# Altium PCB Sony UX BMS.PcbDoc
Units mil, origin at the board's own origin, x right, y up, seen from the top; angles counter-clockwise.
Board outline 2520.22 x 748.56 mil, 2 copper layers (Top Layer, Bottom Layer); 23 components, 13 nets, 92 pads, 8 vias.
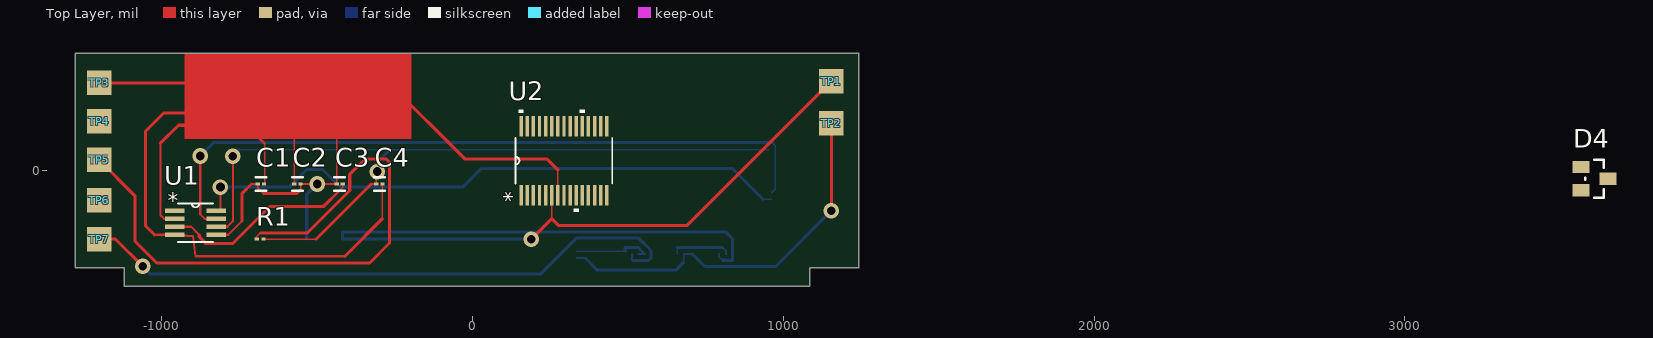
[diagram p0: Top Layer view]
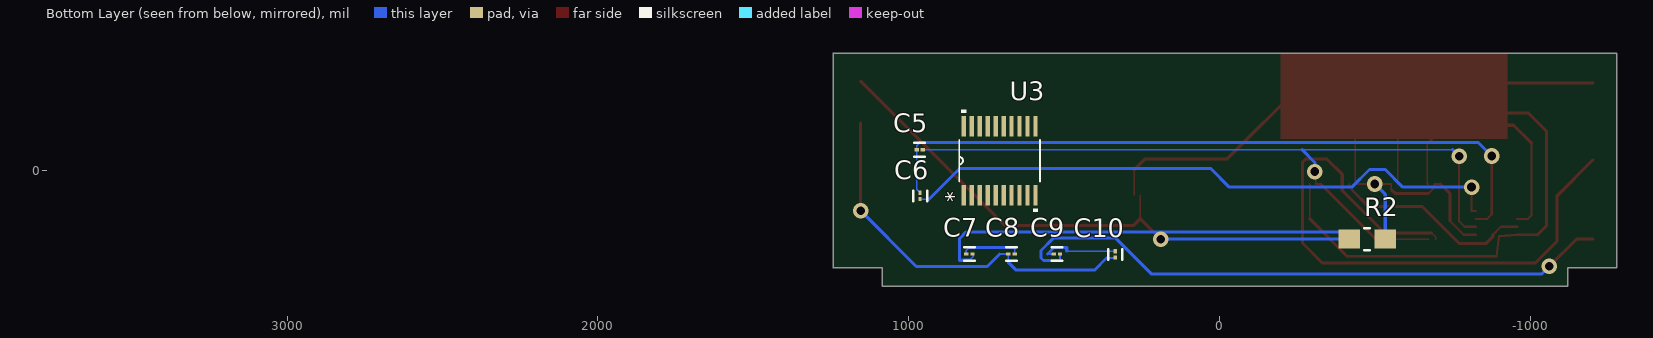
[diagram p1: Bottom Layer view, seen from below]
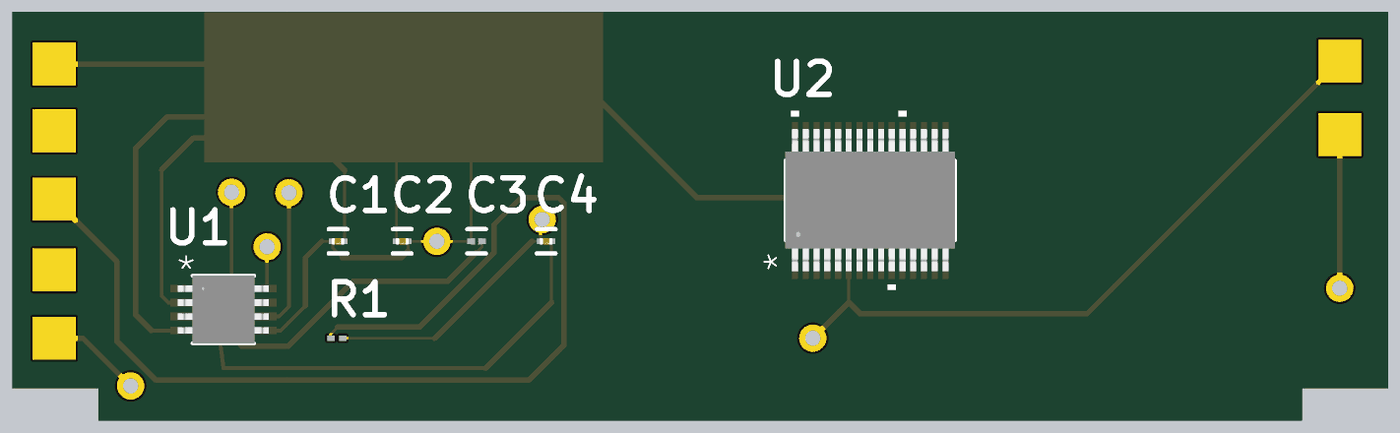
[diagram p2: 3D render of the assembled board from above, using the file's embedded part models]
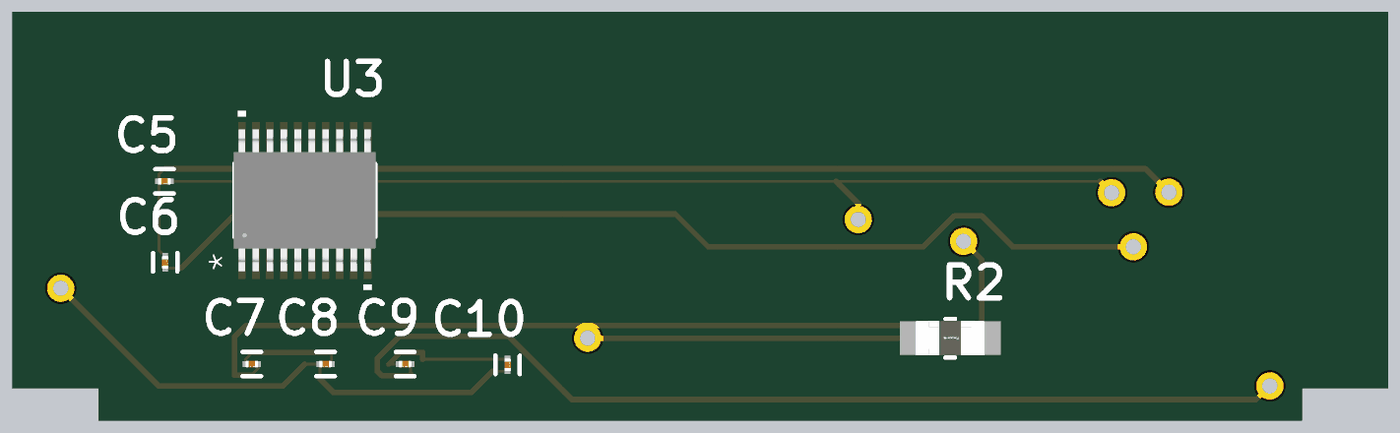
[diagram p3: 3D render of the assembled board from below, using the file's embedded part models]

## Layer stack, top to bottom
Top Solder: solder mask 0.4, Solder Resist, Dk 3.5
Top Layer: signal copper 1.4
Dielectric 1: dielectric 12.6, FR-4, Dk 4.8
Bottom Layer: signal copper 1.4
Bottom Solder: solder mask 0.4, Solder Resist, Dk 3.5

## Board outline
-1276.34,-314.27 -1119.12,-314.27 -1119.12,-373.06 -1118.86,-373.33 1085.87,-373.33 1086.13,-373.06 1086.13,-314.27 1243.35,-314.27 1243.61,-314.01 1243.61,374.97 1243.35,375.23 -1276.34,375.23 -1276.6,374.97

## Design rules (kind name [scope] priority, off if disabled: settings)
Clearance [All] p1: gap=10 ignorepadtopadclearanceinfootprint=FALSE except(0: Arc-Hole Track-Hole SMDPad-Hole THPad-Hole Via-Hole Fill-Hole Poly-Hole Region-Hole Text-Hole)
PolygonConnect [All] p1: connectstyle=Relief reliefconductorwidth=10 reliefentries=4 polygonreliefangle="90 Angle" airgapwidth=10
RoutingVias [All] p1: holewidth=28 width=50 viastyle="Through Hole" minholewidth=28 minwidth=50 maxholewidth=28 maxwidth=50
SMDNeckDown [All] p1: percent=50.000
SolderMaskExpansion [All] p1: expansion=4 istentingtop=FALSE
Width [All] p1: maxlimit=10 minlimit=10 preferedwidth=10
30 further rules are at their usual default settings.

## Components (designator, comment, footprint, x,y, rotation, side; value= is the part's Value field where it differs from the comment)
C1 "0.1uF" FP-GRM033-0_03-IPC_C -680.01,-45 r0 top
C2 "0.1uF" FP-GRM033-0_03-IPC_C -562.48,-45 r0 top
C3 "0.22uF" FP-CL03-IPC_C -426.24,-45 r0 top
C4 "0.1uF" FP-GRM033-0_03-IPC_C -298.76,-45 r0 top
C5 "0.1uF" FP-GRM033-0_03-IPC_C 965.01,65 r180 bottom
C6 "0.1uF" FP-GRM033-0_03-IPC_C 963.69,-83.5 r90 bottom
C7 "0.1uF" FP-GRM033-0_03-IPC_C 805.01,-270 r180 bottom
C8 "0.1uF" FP-GRM033-0_03-IPC_C 669.83,-270 r180 bottom
C9 "0.1uF" FP-GRM033-0_03-IPC_C 523.88,-270 r180 bottom
C10 "0.1uF" FP-GRM033-0_03-IPC_C 336.44,-271.32 r90 bottom
D4 "BAT54C" FP-MA03D-MFG 3610,-28.07 r0 top value=10pF
R1 "1k" RESC0603X26X15LL03T05 -682.23,-222.54 r0 top
R2 "0.010 75ppm" FP-ERJ8CW-MFG -474.3,-222.54 r0 bottom
TP1 "Pad" PAD_SQ_2MM 1155,285 r0 top
TP2 "Pad" PAD_SQ_2MM 1155,150.63 r0 top
TP3 "1N" PAD_SQ_2MM -1200,280 r0 top
TP4 "1P" PAD_SQ_2MM -1200,157.4 r0 top
TP5 "2P" PAD_SQ_2MM -1200,32.24 r0 top
TP6 "3P" PAD_SQ_2MM -1200,-97.38 r0 top
TP7 "4P" PAD_SQ_2MM -1200,-222.54 r0 top
U1 "BQ29412DCTRG4-SQ" DCT8 -890,-170 r0 top
U2 "BQ29330DBT" DBT30 295,30 r90 top
U3 "BQ20Z70PW-V160" PW20 708.03,30 r90 bottom

## Footprints (in the part's own frame and the unit in brackets; to place one, negate y for a bottom-side part, rotate by r counter-clockwise, add the part's x,y. Pads: shape width x height; smd on the part's side, far side on the other; paste and mask are expansions set on the pad)
DBT30 [mil]
  rect 66x11 smd paste-33 mask-33: 1(-111,137.8) 2(-111,118.11) 3(-111,98.43) 4(-111,78.74) 5(-111,59.06) 6(-111,39.37) 7(-111,19.69) 8(-111,0) 9(-111,-19.68) 10(-111,-39.37) 11(-111,-59.05) 12(-111,-78.74) 13(-111,-98.42) 14(-111,-118.11) 15(-111,-137.79) 16(111,-137.79) 17(111,-118.11) 18(111,-98.42) 19(111,-78.74) 20(111,-59.05) 21(111,-39.37) 22(111,-19.68) 23(111,0) 24(111,19.69) 25(111,39.37) 26(111,59.06) 27(111,78.74) 28(111,98.43) 29(111,118.11) 30(111,137.8)
  silkscreen extent -164,-155 164,156, body extent -130,-156 131,156, height 47
DCT8 [mil]
  rect 61.5x14 smd paste-30.75 mask-31: 1(-66.75,38.39) 2(-66.75,12.8) 3(-66.75,-12.8) 4(-66.75,-38.39) 5(66.75,-38.39) 6(66.75,-12.8) 7(66.75,12.8) 8(66.75,38.39)
  silkscreen extent -57,-62 57,62, body extent -84,-62 84,62, height 51
FP-CL03-IPC_C [mil]
  rect 13.94x10.34 smd paste+0 mask+0: 1(-10.01,0) 2(10.01,0)
  silkscreen extent -17,-22 17,22, body extent -21,-10 21,10, height 10
FP-ERJ8CW-MFG [mm]
  rect 1.75x1.55 smd paste+0 mask+0: 1(-1.475,0) 2(1.475,0)
  silkscreen extent -0.23,-0.9 0.23,0.9, body extent -1.6,-0.8 1.6,0.8, height 0.75
FP-GRM033-0_03-IPC_C [mil]
  rect 13.94x10.34 smd paste+0 mask+0: 1(-10.01,0) 2(10.01,0)
  silkscreen extent -17,-22 17,22, body extent -21,-10 21,10, height 10
FP-MA03D-MFG [mm]
  rect 1.4x1 smd paste+0 mask+0: 1(-1.1,0.95) 2(-1.1,-0.95) 3(1.1,0)
  silkscreen extent -0.75,-1.56 0.75,1.56, body extent -1.9,-1.66 1.9,1.66, height 0.25
PAD_SQ_2MM [mm]
  rect 2x2 smd paste-1: 1(0,0)
PW20 [mil]
  rect 66x14 smd paste-33 mask-33: 1(-111,115.16) 2(-111,89.57) 3(-111,63.98) 4(-111,38.39) 5(-111,12.8) 6(-111,-12.8) 7(-111,-38.39) 8(-111,-63.98) 9(-111,-89.57) 10(-111,-115.16) 11(111,-115.16) 12(111,-89.57) 13(111,-63.98) 14(111,-38.39) 15(111,-12.8) 16(111,12.8) 17(111,38.39) 18(111,63.98) 19(111,89.57) 20(111,115.16)
  silkscreen extent -164,-130 164,130, body extent -130,-130 130,130, height 47
RESC0603X26X15LL03T05 [mm] "Chip Resistor, 2-Leads, Body 0.60x0.30mm, IPC High Density"
  rect 0.35x0.25 smd: 1(-0.275,0) 2(0.275,0)
  body extent -0.32,-0.16 0.31,0.17, height 0.26

## Part data
C1 C2 C4 C5 C6 C7 C8 C9 C10: library part CMP-2010-01264-2, "Chip Multilayer Ceramic Capacitors for General Purpose, 0201, 0.10uF, X5R, 15%, 10%, 10V", Capacitance=100nF, Case Code (Imperial)=0201, Case Code (Metric)=0603, Dielectric=X5R, Max Operating Temperature=85°C, Min Operating Temperature=-55°C, Package Quantity=1, Tolerance=10%, Voltage=10V, Case/Package=0201, Depth=0.3mm, Height=0.3mm, Lead Free="Lead Free", Length=0.6mm, Mount="Surface Mount", Packaging="Tape and Reel", Radiation Hardening=No, REACH SVHC="No SVHC", Termination=SMD/SMT, Thickness=0.013inch, Voltage Rating=10V, Voltage Rating (DC)=10V, Weight=6E-06oz, Width=0.012inch
C3: library part CMP-13271-002367-1, "Cap Ceramic 220nF 10V X5R ±10% Pad SMD 0201 +85°C T/R", Capacitance=220nF, Case Code (Imperial)=0201, Case Code (Metric)=0603, Dielectric=X5R, Max Operating Temperature=85°C, Min Operating Temperature=-55°C, Package Quantity=1, Tolerance=10%, Voltage Rating=10V, Case/Package=0201, Depth=0.3mm, Lead Free="Lead Free", Length=0.6mm, Mount="Surface Mount", Packaging="Tape and Reel", Radiation Hardening=No, Thickness=0.013inch, Voltage Rating (DC)=10V, Width=0.012inch
D4: library part CMP-07162-000010-1, "DIODE ARRAY SCHOTTKY 30V SOT23-3", Capacitance=10pF, Forward Current=200mA, Manufacturer="ON Semiconductor", Max Junction Temp=+150°C, Max Repetitive Reverse Voltage=30V, Max Surge Forward Current=600mA, Package=MA03D, Peak Reverse Current=2uA, Temperature="-55°C to +150°C", Temperature Range Low=-55°C, Automotive=No, Category=Diode, ComponentLink2Description=Datasheet, ComponentLink2URL=https://media.digikey.com/pdf/Data%20Sheets/ON%20Semiconductor%20PDFs/BAT54(A,C,S).pdf, Device Class L1="Discrete Semiconductors", Device Class L2=Diodes, Device Class L3="Schottky Diodes", Digikey Description="DIODE ARRAY SCHOTTKY 30V SOT23-3", Height=1.2mm, Manufacturer Part Number=BAT54C, Obsolete Part=true, Octopart=https://octopart.com/bat54c-on+semiconductor-8095621, Reverse Voltage=30V, Standoff Height=0mm, Temperature Range High=+150°C
R1: library part CMP-2004-03624-1, Manufacturer="TE Connectivity / AMP", Part Number=CRG0201F1K0
R2: library part CMP-2003-00786-2, "RES 0.01 OHM 1% 1W 1206", Case Code (Imperial)=1206, Case Code (Metric)=3216, Max Operating Temperature=125°C, Max Power Dissipation=1W, Min Operating Temperature=-55°C, Resistance=10mR, Resistor Type="Thick Film", Temperature Coefficient=75ppm/°C, Tolerance=1%, Case/Package=1206, Depth=1.6mm, Features="Automotive AEC-Q200", Height=0.03inch, Lead Free="Lead Free", Length=3.2mm, Military Standard=Not, Mount="Surface Mount", Number of Terminations=2, Packaging="Cut Tape", Power Rating=1W, REACH SVHC="No SVHC", Termination=Flat, Width=0.063inch
TP1 TP2 TP3 TP4 TP5 TP6 TP7: library part PAD_SQ_2MM, "Test Point Square 2mm"
U2 U3: "No Description Available", Mfr_Name="Texas Instruments", RefDes=RefDes, Type=Type

## Via types
v1: diameter 50, hole 28, Top Layer to Bottom Layer, 8 vias

## Nets (pads, with @x,y where several pads share a name; then routed paths per layer and width w, separated by ;. In a path a pad name is that pad's centre, name@x,y a point inside that pad or via, vN(x,y) a via of type N, cw(c..) or ccw(c..) an arc to the next point about the centre after c; other vN are vias at no path point)
"BAT +": C9.2 TP7.1 | length 1993.9
  Top Layer w10: TP7.1 -1147.46,-222.54 v1(-1060,-310)
  Bottom Layer w5.17: C9.2 514,-270 514,-288
  Bottom Layer w10: v1(-1060,-310) -1035,-335 219.06,-335 335.06,-219 535,-219 575,-259 575,-283 567,-291 517,-291 514,-288
"BAT -": C1.1 C2.2 C3.1 R2.1 TP3.1 U1.5 U2.7 | length 2806.3
  Top Layer w5.17: -710,-45 C1.1 -690,-57 -672,-75 ; C2.2 C2.2@-552,-45 ; -552,-63 C2.2@-552,-45 ; -436.25,116.25 C3.1 v1(-498.91,-45) C2.2@-552,-45
  Top Layer w5.5: U2.7 275.31,0.69
  Top Layer w7: U1.5 -785,-208.39 -740,-163.39
  Top Layer w10: TP3.1 -600,280 ; -740,-163.39 -740,-75 -710,-45 ; -672,-75 -564,-75 -552,-63 ; -436.25,116.25 -600,280 ; 275.31,0.69 241,35 -23,35 -268,280 -600,280
  Bottom Layer w10: R2.1 -532.37,-78.46 v1(-498.91,-45)
NetC1_2: C1.2 U1.2 | length 797.8
  Top Layer w5.17: C1.2 -668,-45 -668,85
  Top Layer w7: -1003,86 -1003,-145 -990.8,-157.2 U1.2
  Top Layer w10: -1003,86 -945,144 -727,144 -668,85
NetC2_1: C2.1 C4.2 U1.4 | length 1997.3
  Top Layer w5.17: -573,131 -573,-45 C2.1 ; -289,-157 -289,-45 C4.2
  Top Layer w7: -1022,-208.39 U1.4 -898.16,-213.13 -889.85,-277.38 -409.38,-277.38
  Top Layer w10: -1022,-208.39 -1051,-179.39 -1051,125 -993,183 -625,183 -573,131 ; -409.38,-277.38 -289,-157
NetC3_2: C3.2 U1.3 | length 652.3
  Top Layer w5.17: -427,-66 -416,-55 -416,-45 C3.2
  Top Layer w7: U1.3 -904.2,-182.8 -878,-209
  Top Layer w10: -878,-209 -878,-215 -856,-237 -771,-237 -652,-118 -479,-118 -427,-66
NetC4_1: C4.1 C5.2 R1.2 U1.6 | length 2567.7
  Top Layer w4.92: R1.2 -502.65,-222.54
  Top Layer w5.17: -325.11,-45 C4.1@-309,-45 ; v1@-309,-8 C4.1@-309,-45 ; C4.1 C4.1@-309,-45
  Top Layer w7: U1.6 -787.8,-182.8 -770,-165 v1(-770,44)
  Top Layer w10: -502.65,-222.54 -325.11,-45 ; v1@-309,-8 v1(-306,-5)
  Bottom Layer w5.17: -749,65 -265,65 C5.2
  Bottom Layer w10: v1(-770,44) -749,65 ; v1(-306,-5) -306,24 -265,65
NetC5_1: C5.1 C6.2 U1.7 | length 2273.7
  Top Layer w7: v1(-875,45) -875,-142.8 -860.59,-157.2 U1.7
  Bottom Layer w5.17: C6.2 963.69,-73 975,-61.69 C5.1 975,78 965,88
  Bottom Layer w10: v1(-875,45) -832,88 965,88
NetC6_1: C6.1 U1.8 | length 1976.7
  Top Layer w7: U1.8 -810,-131.61 v1(-810,-55)
  Bottom Layer w5.17: 935,-94 963.69,-94 C6.1
  Bottom Layer w10: v1(-810,-55) -588.91,-55 -532.37,1.54 -481.54,1.54 -425,-55 -31,-55 29,5 836,5 935,-94
NetC7_1: C7.1 C8.2 | length 194.4
  Bottom Layer w5.17: 659,-249 659,-270 C8.2 ; 805,-249 816,-260 816,-270 C7.1
  Bottom Layer w10: 659,-249 805,-249
NetC9_1: C9.1 C10.2 | length 258.7
  Bottom Layer w5.17: C10.2 336.44,-261 492,-261 ; C9.1 554,-270
  Bottom Layer w10: 492,-261 492,-249 533,-249 554,-270
NetR1_1: R1.1 TP5.1 | length 2017.7
  Top Layer w4.92: R1.1 -694,-222.54 -694,-215 -681,-202
  Top Layer w10: TP5.1 -1085,-82.76 -1085,-228.43 -1014.43,-299 -330,-299 -266,-235 -266,25 -276,35 -345,35 -394,-14 -394,-66 -530,-202 -681,-202
"PACK +": C8.1 C10.1 TP2.1 | length 1246.4
  Top Layer w10: v1(1155,-131) TP2.1
  Bottom Layer w5.17: C10.1 336.44,-283 364.06,-283 ; C8.1 C8.1@680,-270 ; 680,-297 C8.1@680,-270 ; 708,-270 C8.1@680,-270
  Bottom Layer w10: 364.06,-283 403.06,-322 655,-322 680,-297 ; 708,-270 748.17,-310.17 975.83,-310.17 v1(1155,-131)
"PACK -": C7.2 R2.2 TP1.1 U2.6 | length 3290.5
  Top Layer w5.5: 255.63,-156.63 U2.6
  Top Layer w10: v1(189.72,-222.54) 255.63,-156.63 277,-178 692,-178 TP1.1
  Bottom Layer w5.17: C7.2 793,-270 793,-278.17 805,-290.17
  Bottom Layer w10: v1(189.72,-222.54) R2.2 -417,-222.54 -417,-199 815,-199 837,-221 837,-290.17 805,-290.17
pads on no net: D4.1 D4.2 D4.3 TP4.1 TP6.1 U1.1 U2.1 U2.2 U2.3 U2.4 U2.5 U2.8 U2.9 U2.10 U2.11 U2.12 U2.13 U2.14 U2.15 U2.16 U2.17 U2.18 U2.19 U2.20 U2.21 U2.22 U2.23 U2.24 U2.25 U2.26 U2.27 U2.28 U2.29 U2.30 U3.1 U3.2 U3.3 U3.4 U3.5 U3.6 U3.7 U3.8 U3.9 U3.10 U3.11 U3.12 U3.13 U3.14 U3.15 U3.16 U3.17 U3.18 U3.19 U3.20

## Other copper
Top Layer:
  rectangle: -925,100 -195,375

## Silkscreen, mask and mechanical layers (free items; w line width, h text height)
Mechanical 1:
  lines w0.5: -193.66,374.97 -193.66,99.38 -922,99.38 -922,374.97 -1276.34,374.97 ; 1085.87,-314.01 1085.87,-373.06 -1118.85,-373.06 -1118.85,-314.01 -1276.34,-314.01 -1276.34,374.97 ; 1243.35,374.97 -1276.34,374.97

## Text inside footprints (layer, text, board x,y; h text height)
U1: Mechanical 13 "*" at -979.25,-122.61 h50; Top Overlay "*" at -979.25,-122.61 h50
U2: Mechanical 13 "*" at 151.2,-103.5 h50 r90; Top Overlay "*" at 151.2,-103.5 h50 r90
U3: Mechanical 13 "*" at 832.18,-103.5 h50 r270; Bottom Overlay "*" at 832.18,-103.5 h50 r270